# Altium PCB second_pcb.PcbDoc
Units mm, origin at the board's own origin, x right, y up, seen from the top; angles counter-clockwise.
Board outline 33.15 x 95 mm, 2 copper layers (Top Layer, Bottom Layer); 5 components, 31 nets, 24 pads, 0 vias.
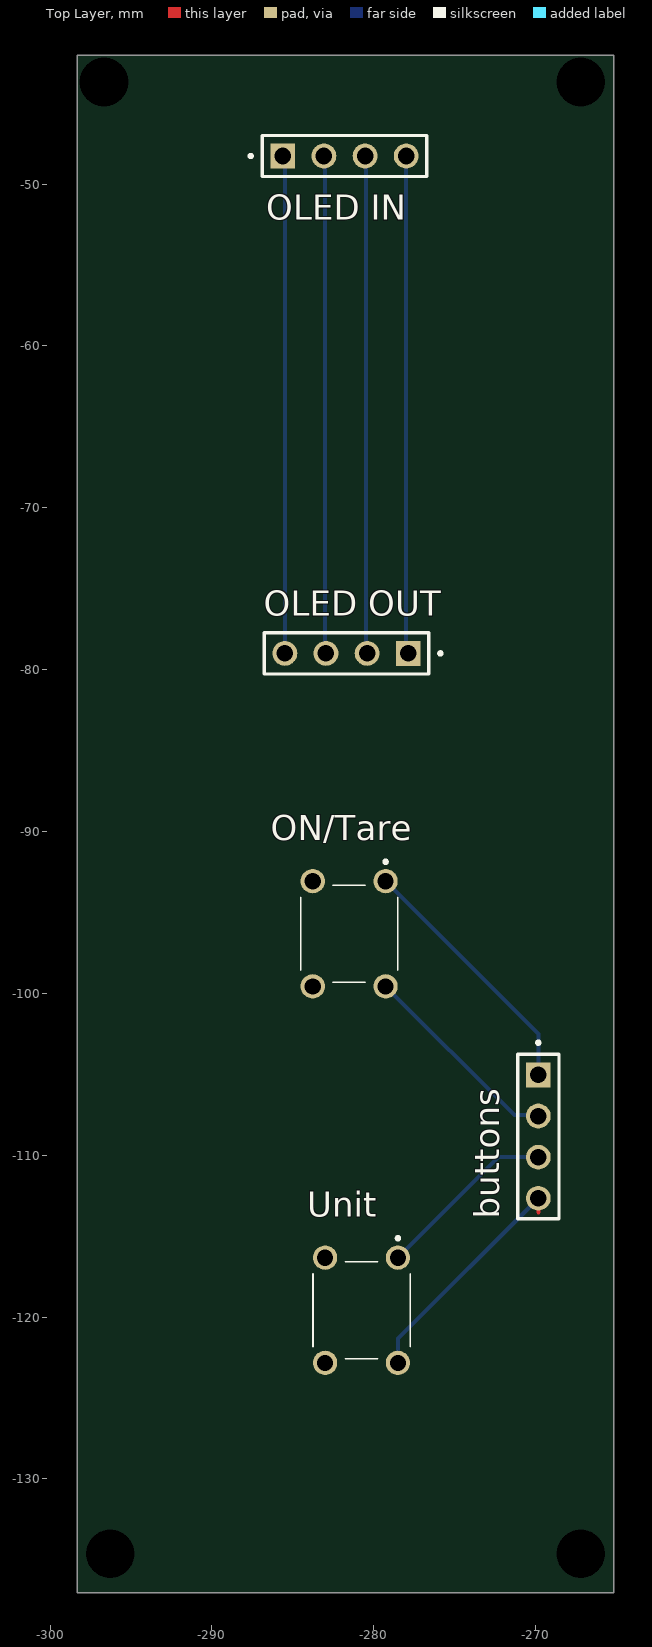
[diagram p0: Top Layer view]
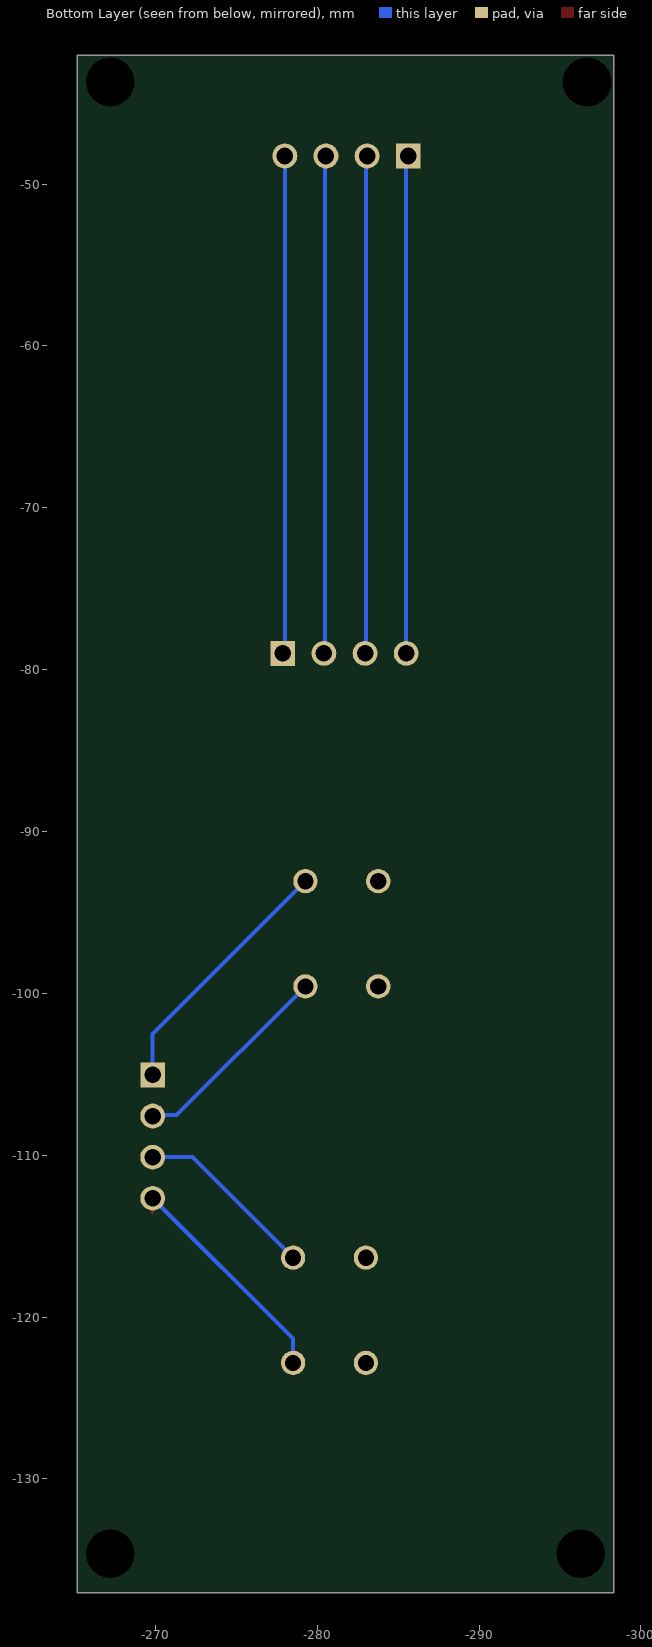
[diagram p1: Bottom Layer view, seen from below]
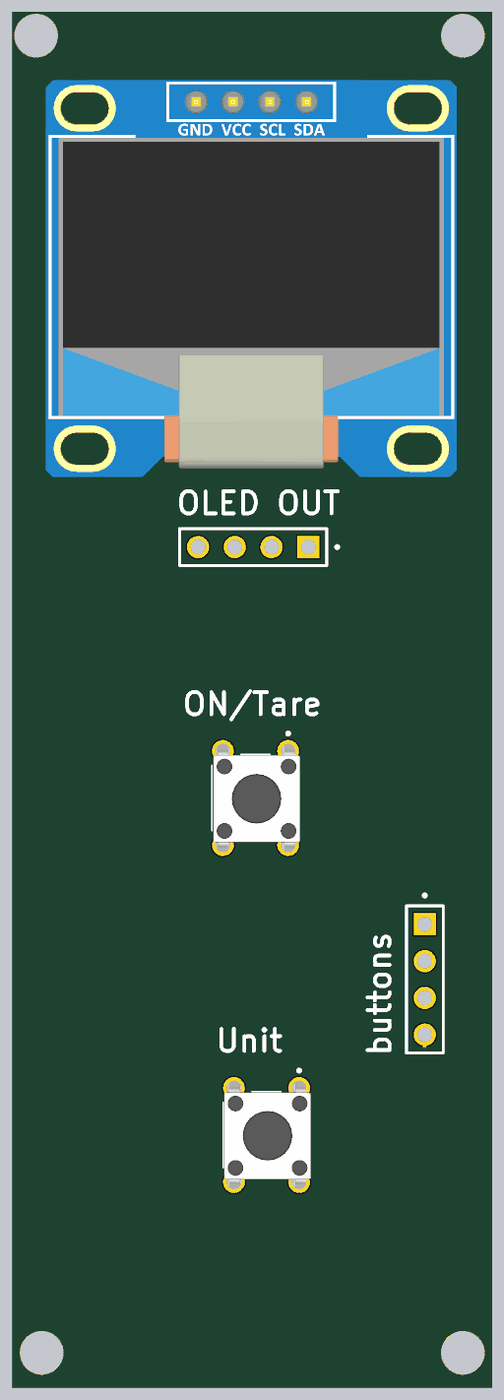
[diagram p2: 3D render of the assembled board from above, using the file's embedded part models]

## Layer stack, top to bottom
Top Solder: solder mask 0.0102, Solder Resist, Dk 3.5
Top Layer: signal copper 0.0356
Dielectric 1: dielectric 0.32, FR-4, Dk 4.8
Bottom Layer: signal copper 0.0356
Bottom Solder: solder mask 0.0102, Solder Resist, Dk 3.5

## Board outline
-298.323,-137.033 -265.176,-137.033 -265.176,-42.037 -298.323,-42.037

## Design rules (kind name [scope] priority, off if disabled: settings)
Clearance [All] p1: gap=0.254 ignorepadtopadclearanceinfootprint=FALSE except(0: Arc-Hole Track-Hole SMDPad-Hole THPad-Hole Via-Hole Fill-Hole Poly-Hole Region-Hole Text-Hole)
ComponentClearance [All] p1: gap=0.254 collisioncheckmode=3 verticalgap=2540 showdistances=FALSE
PolygonConnect [All] p1: connectstyle=Relief reliefconductorwidth=0.254 reliefentries=4 polygonreliefangle="90 Angle" airgapwidth=0.254
RoutingVias [All] p1: holewidth=0.711 width=1.27 viastyle="Through Hole" minholewidth=0.711 minwidth=1.27 maxholewidth=0.711 maxwidth=1.27
SolderMaskExpansion [All] p1: expansion=0.102 istentingtop=FALSE
Width [All] p1: maxlimit=0.254 minlimit=0.254 preferedwidth=0.254
29 further rules are at their usual default settings.

## Components (designator, comment, footprint, x,y, rotation, side; value= is the part's Value field where it differs from the comment)
buttons "MTSW-104-XX-X-S-XXX" SAMTEC_MTSW-104-XX-X-S-XXX -269.835,-108.849 r270 top
"OLED IN" "MTSW-104-XX-X-S-XXX" SAMTEC_MTSW-104-XX-X-S-XXX -281.813,-48.26 r0 top
"OLED OUT" "MTSW-104-XX-X-S-XXX" SAMTEC_MTSW-104-XX-X-S-XXX -281.686,-78.994 r180 top
ON/Tare "FSM12JH" FSM12JH -279.173,-93.068 r270 top
Unit "FSM12JH" FSM12JH -278.411,-116.332 r270 top

## Footprints (in the part's own frame and the unit in brackets; to place one, negate y for a bottom-side part, rotate by r counter-clockwise, add the part's x,y. Pads: shape width x height; smd on the part's side, far side on the other; paste and mask are expansions set on the pad)
FSM12JH [mm]
  round 1.5 hole 1: 1(0,-0.1) 2(6.5,-0.1) 3(6.5,-4.6) 4(0,-4.6)
  silkscreen extent -1.3,-5.35 6.25,0.65, body extent -0.54,-5.28 7.15,0.72, height 4.95
SAMTEC_MTSW-104-XX-X-S-XXX [mm]
  rect 1.53x1.53 hole 1.02: 01(-3.81,0)
  round 1.53 hole 1.02: 02(-1.27,0) 03(1.27,0) 04(3.81,0)
  silkscreen extent -5.9,-1.27 5.08,1.27

## Part data
buttons "OLED IN" "OLED OUT": Package=None, Availability="No availability data", Check_prices=https://www.snapeda.com/parts/MTSW-104-12-F-S-850/Samtec/view-part/6593359/?ref=eda, MF=Samtec, MP=MTSW-104-12-F-S-850, Price=None, SnapEDA_Link=https://www.snapeda.com/parts/MTSW-104-12-F-S-850/Samtec/view-part/6593359/?ref=snap
ON/Tare Unit: "TE CONNECTIVITY / ALCOSWITCH - FSM12JH - FSM12JH=6MM TACT SWITCH, HIGH TEMP 23R8443", Manufacturer_Name="TE Connectivity", Mouser Part Number=506-FSM12JH, Datasheet Link=https://www.te.com/commerce/DocumentDelivery/DDEController?Action=srchrtrv&DocNm=1825910&DocType=Customer+Drawing&DocLang=English&DocFormat=pdf&PartCntxt=2-1825910-2, Geometry.Height=8mm, Manufacturer_Part_Number=FSM12JH, Mouser Price/Stock=https://www.mouser.co.uk/ProductDetail/TE-Connectivity/FSM12JH?qs=qzQkFgQjdxUp2583VNq5KQ%3D%3D

## Free pads (board coordinates)
  round 1.524 hole 3: 7(-267.208,-43.688) 8(-296.291,-134.62) 9(-267.208,-134.62) 10(-296.672,-43.688)

## Nets (pads, with @x,y where several pads share a name; then routed paths per layer and width w, separated by ;. In a path a pad name is that pad's centre, name@x,y a point inside that pad or via, vN(x,y) a via of type N, cw(c..) or ccw(c..) an arc to the next point about the centre after c; other vN are vias at no path point)
A+: 
A-: 
BatLev: 
DT: 
E+: 
E-: 
FLASH: 
GND: 
Netbattery_1: 
Netbuttons_01: buttons.01 ON/Tare.1 | length 15.9
  Bottom Layer w0.254: ON/Tare.1 -269.835,-102.506 buttons.01
Netbuttons_02: buttons.02 ON/Tare.2 | length 12.8
  Bottom Layer w0.254: ON/Tare.2 -271.318,-107.523 -269.891,-107.523 buttons.02
Netbuttons_03: buttons.03 Unit.1 | length 11.2
  Bottom Layer w0.254: Unit.1 -272.298,-110.119 buttons.03
Netbuttons_04: buttons.04 Unit.2 | length 14.6
  Top Layer w0.254: -269.835,-113.521 buttons.04
  Bottom Layer w0.254: Unit.2 -278.511,-121.335 buttons.04
NetC5-4.7uF_1: 
NetESP-12F_3: 
NetLED_1: 
NetLED_2: 
NetMCP73831_5: 
"NetOLED IN_01": "OLED IN.01" "OLED OUT.04" | length 30.8
  Bottom Layer w0.254: -285.623,-48.26 -285.496,-48.387 -285.496,-78.994
"NetOLED IN_02": "OLED IN.02" "OLED OUT.03" | length 30.8
  Bottom Layer w0.254: -283.083,-48.26 -283.019,-48.323 -283.019,-78.93 -282.956,-78.994
"NetOLED IN_03": "OLED IN.03" "OLED OUT.02" | length 30.8
  Bottom Layer w0.254: -280.543,-48.26 -280.479,-48.323 -280.479,-78.93 -280.416,-78.994
"NetOLED IN_04": "OLED IN.04" "OLED OUT.01" | length 30.8
  Bottom Layer w0.254: -278.003,-48.26 -278.003,-78.867 -277.876,-78.994
RST: 
RX: 
SCK: 
SCL: 
SDA: 
Tare: 
TX: 
Unit: 
VCC: 
pads on no net: ON/Tare.3 ON/Tare.4 Unit.3 Unit.4